# Altium PCB VeggieIrrigation.PcbDoc
Units mil, origin at the board's own origin, x right, y up, seen from the top; angles counter-clockwise.
Board outline 6000 x 4000 mil, 2 copper layers (Top Layer, Bottom Layer); 26 components, 18 nets, 76 pads, 0 vias.
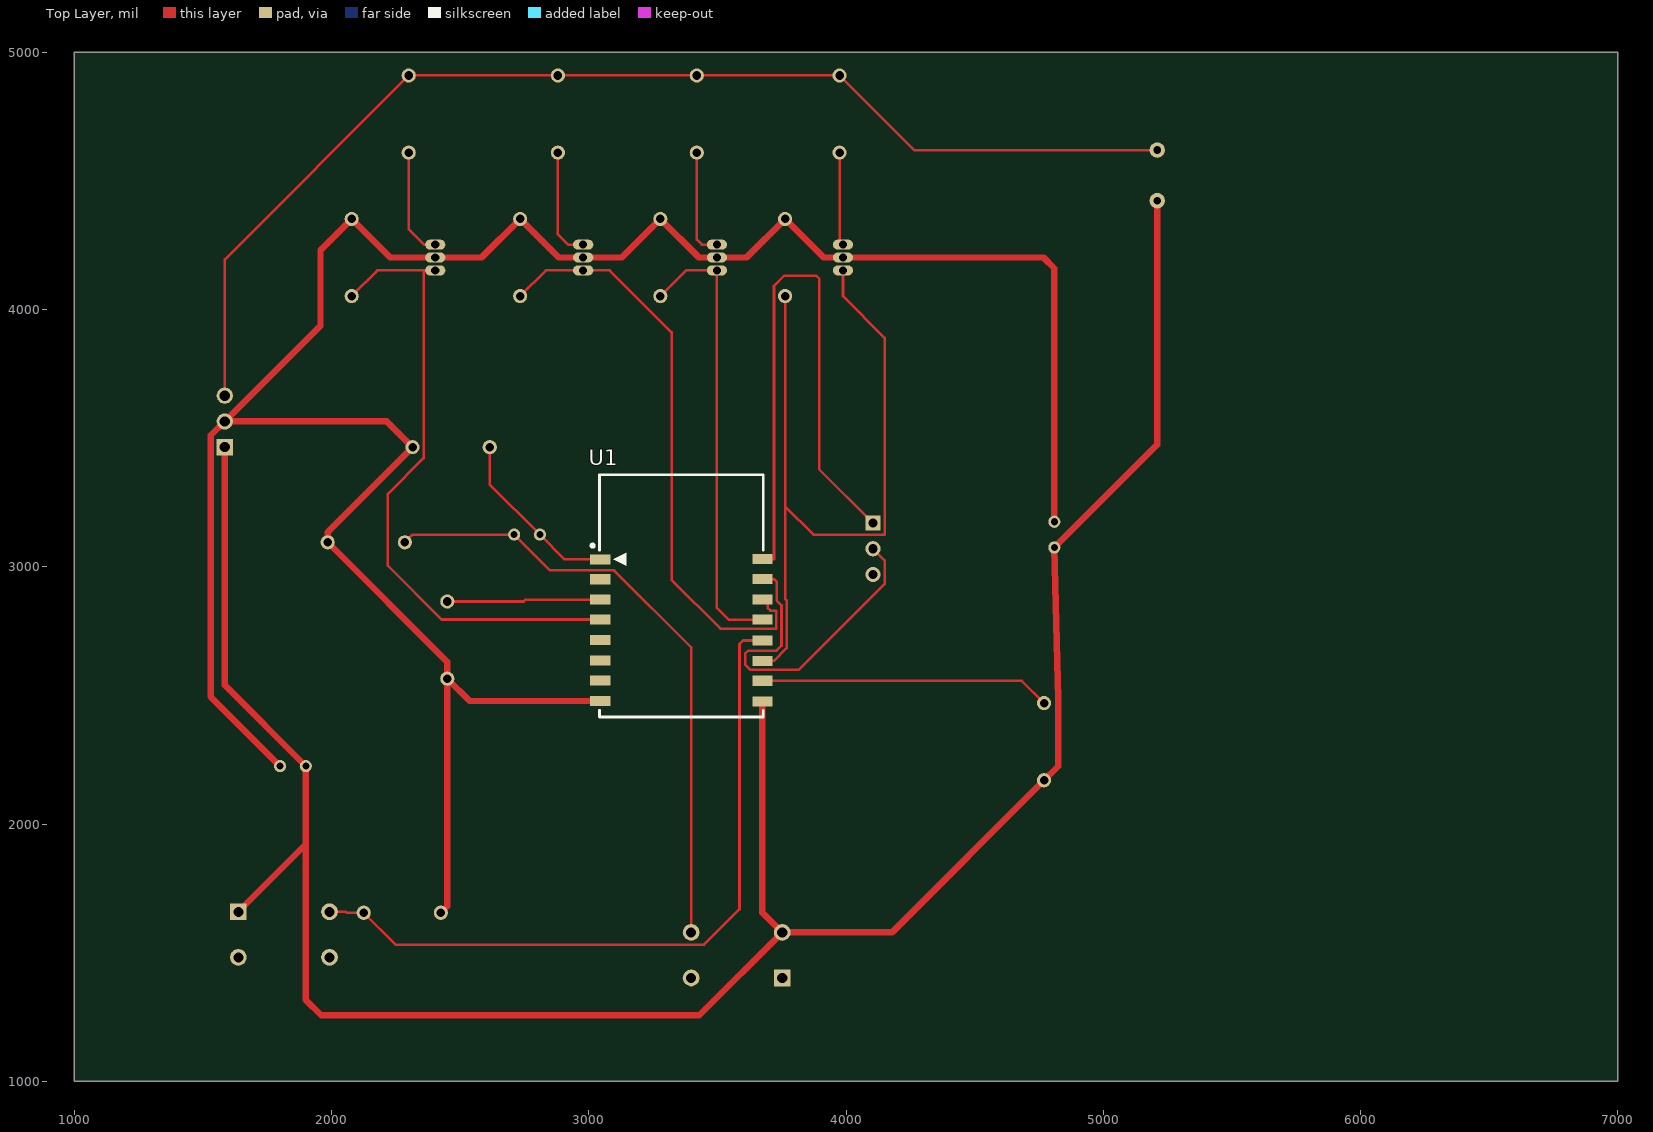
[diagram p0: Top Layer view]
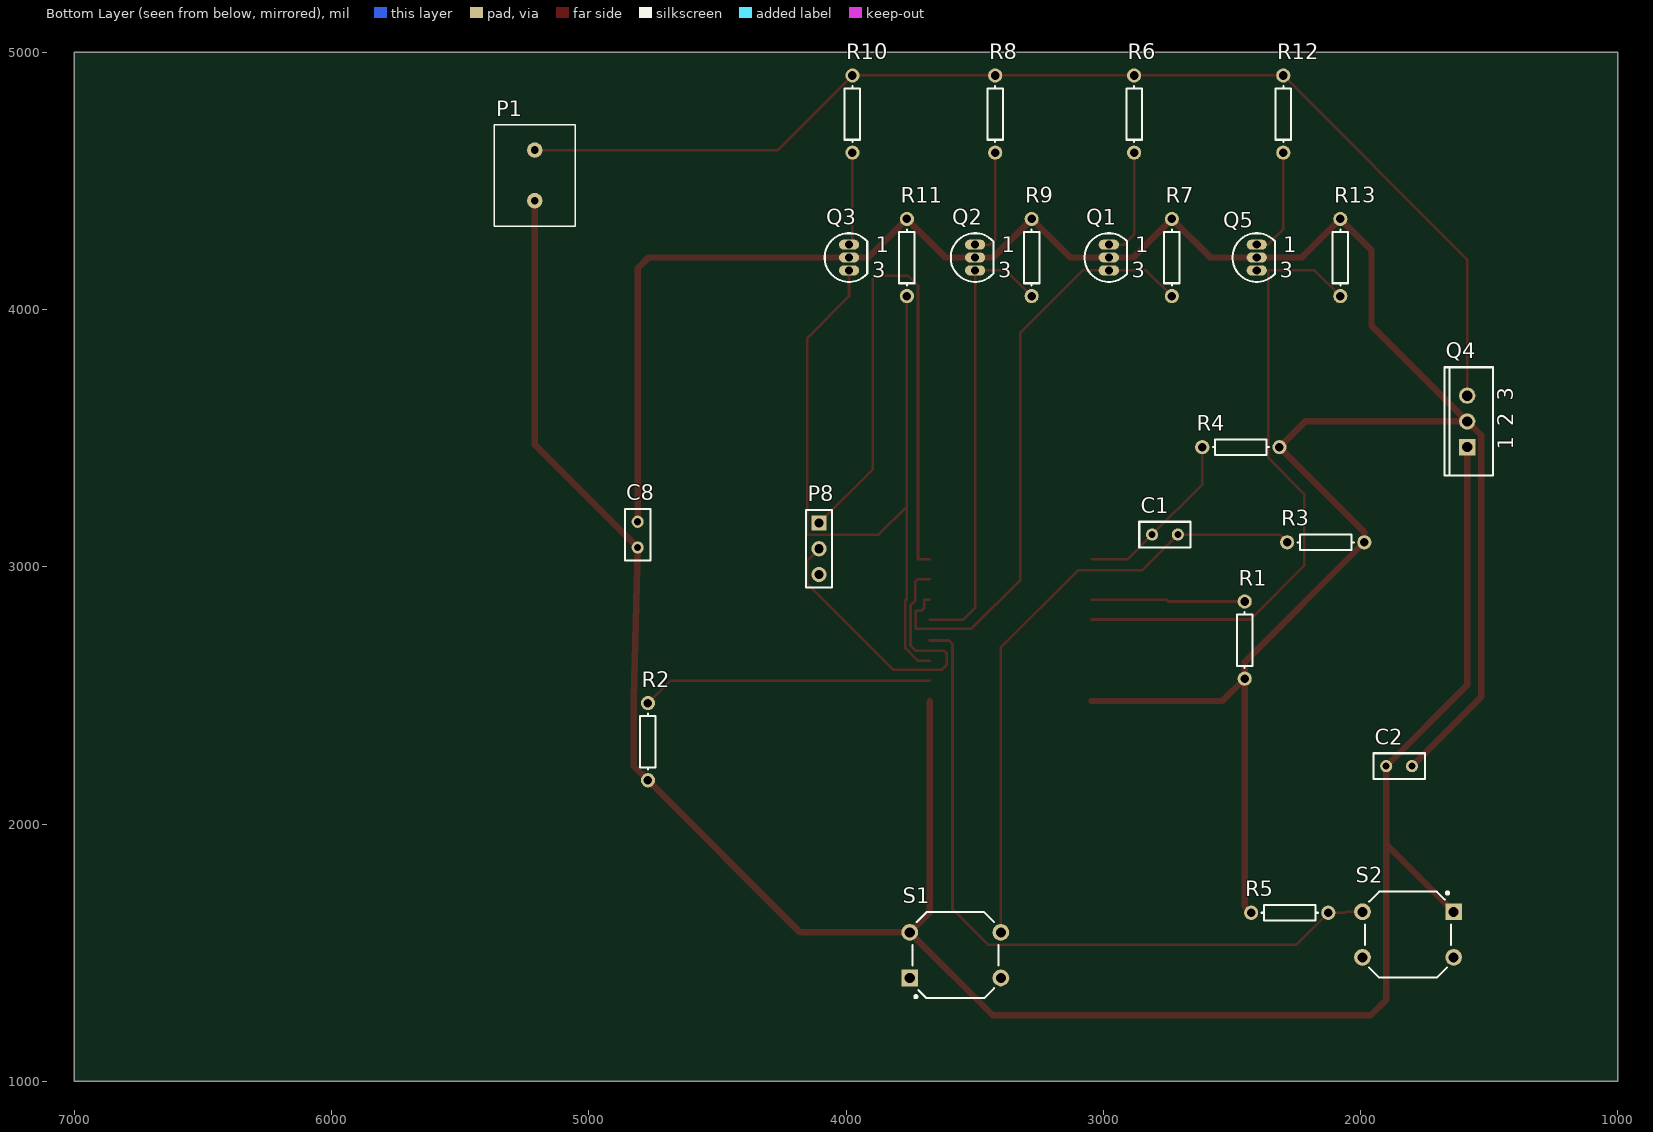
[diagram p1: Bottom Layer view, seen from below]

## Layer stack, top to bottom
Top Solder: solder mask 0.4, Solder Resist, Dk 3.5
Top Layer: signal copper 1.4
Dielectric 1: dielectric 12.6, FR-4, Dk 4.8
Bottom Layer: signal copper 1.4
Bottom Solder: solder mask 0.4, Solder Resist, Dk 3.5

## Board outline
1000,1000 7000,1000 7000,5000 1000,5000

## Design rules (kind name [scope] priority, off if disabled: settings)
Clearance [All] p1: gap=10 ignorepadtopadclearanceinfootprint=FALSE except(0: Arc-Hole Track-Hole SMDPad-Hole THPad-Hole Via-Hole Fill-Hole Poly-Hole Region-Hole Text-Hole)
PolygonConnect [All] p1: connectstyle=Relief reliefconductorwidth=10 reliefentries=4 polygonreliefangle="90 Angle" airgapwidth=10
RoutingLayers [All] p1: top layer_v5=TRUE bottom layer_v5=FALSE
RoutingVias [All] p1: holewidth=28 width=50 viastyle="Through Hole" minholewidth=28 minwidth=50 maxholewidth=28 maxwidth=50
SolderMaskExpansion [All] p1: expansion=4
Width "Schematic Width Constraint_2" [InNet('GND')] p1: maxlimit=30 minlimit=20 preferedwidth=25
Width "Schematic Width Constraint_1" [InNet('+3.3VDC')] p2: maxlimit=30 minlimit=15 preferedwidth=25
Width [All] p3: maxlimit=10 minlimit=10 preferedwidth=10
29 further rules are at their usual default settings.

## Components (designator, comment, footprint, x,y, rotation, side; value= is the part's Value field where it differs from the comment)
C1 "10uf" RAD-0.1 2760,3125 r180 bottom
C2 "100nf" RAD-0.1 1850,2225 r0 bottom value=100nF
C8 "100nf" RAD-0.1 4810,3125 r90 bottom value=100nF
P1 "VAC" ScrewTerminal-X2 5052.52,4324.72 r90 bottom
P8 "Pin export" HDR1X3 4105,3170 r270 bottom
Q1 "2N7000" SOT54 2978.27,4202.2 r180 bottom
Q2 "2N7000" SOT54 3498.27,4202.2 r180 bottom
Q3 "2N7000" SOT54 3988.27,4202.2 r180 bottom
Q4 "Regulador 3.3V" TO-220-AB 1585,3565 r90 bottom
Q5 "2N7000" SOT54 2403.27,4202.2 r180 bottom
R1 "10K" AXIAL-0.3 2450,2715 r90 bottom
R2 "10K" AXIAL-0.3 4770,2320 r270 bottom
R3 "10K" AXIAL-0.3 2135,3095 r180 bottom
R4 "10K" AXIAL-0.3 2465,3465 r180 bottom
R5 "10K" AXIAL-0.3 2275,1655 r0 bottom
R6 "10K" AXIAL-0.3 2880,4760 r90 bottom
R7 "10K" AXIAL-0.3 2733.27,4202.2 r90 bottom
R8 "10K" AXIAL-0.3 3420,4760 r90 bottom
R9 "10K" AXIAL-0.3 3278.27,4202.2 r90 bottom
R10 "10K" AXIAL-0.3 3975,4760 r90 bottom
R11 "10K" AXIAL-0.3 3763.27,4202.2 r90 bottom
R12 "10K" AXIAL-0.3 2300,4760 r90 bottom
R13 "10K" AXIAL-0.3 2078.27,4202.2 r90 bottom
S1 "RST" IT-2175 3575,1490 r180 bottom
S2 "Flash" IT-2175 1815,1570 r0 bottom
U1 "ESP-12" ESP_12 3045.08,3028.82 r0 top

## Footprints (in the part's own frame and the unit in brackets; to place one, negate y for a bottom-side part, rotate by r counter-clockwise, add the part's x,y. Pads: shape width x height; smd on the part's side, far side on the other; paste and mask are expansions set on the pad)
AXIAL-0.3 [mm] "Axial Device, Thru-Hole; 2 Leads; 0.3 in Pin Spacing"
  round 1.4 hole 0.85: 1(-3.81,0) 2(3.81,0)
  silkscreen extent -2.77,-0.76 2.77,0.76
ESP_12 [mm]
  rect 2x1 smd: 1(0,0) 2(0,-1.97) 3(0,-3.97) 4(0,-5.94) 5(0,-7.98) 6(0,-9.99) 7(0,-11.98) 8(0,-13.99) 9(16,-14.03) 10(16,-11.99) 11(16,-10.03) 12(16,-8.01) 13(16,-5.95) 14(16,-3.97) 15(16,-1.95) 16(16,0.03)
  silkscreen extent -0.91,-15.57 16.08,8.37
HDR1X3 [mm] "Connector; Header; 3 Position"
  rect 1.5x1.5 hole 0.9: 1(0,0)
  round 1.5 hole 0.9: 2(2.54,0) 3(5.08,0)
  silkscreen extent -1.27,-1.27 6.35,1.27
IT-2175 [mm] "Switch, Push Button, Thru-Hole; 4 Leads; Body 8.5 x 8.5 mm (LxW typ); Row Spacing 9.0 mm; Pitch 4.5 mm"
  rect 1.65x1.65 hole 1: 1(-4.5,-2.25)
  round 1.65 hole 1: 2(4.5,-2.25) 3(-4.5,2.25) 4(4.5,2.25)
  silkscreen extent -4.25,-4.25 4.25,4.25
RAD-0.1 [mm]
  round 1.2 hole 0.7: 1(-1.27,0) 2(1.27,0)
  silkscreen extent -2.54,-1.27 2.54,1.27
ScrewTerminal-X2 [mil]
  round 60 hole 30: 1(98.43,157.48) 2(295.28,157.48)
  silkscreen extent 0,0 394,315
SOT54 [mm] "TO, Flat Index; 3 In-Line, Axial Leads; Body Dia. 4.6mm; Leads 0.48 x 0.45 mm (max)"
  oval 2x1 hole 0.8: 1(0,1.27) 2(0,0) 3(0,-1.27)
  silkscreen extent -2.4,-2.4 1.8,2.4
TO-220-AB [mm] "TO, Thru-Hole, Vertical, Heatsink Mounted; 3 In-Line Leads; Pitch 2.54 mm"
  rect 1.6x1.6 hole 1: 1(-2.54,0)
  round 1.6 hole 1: 2(0,0) 3(2.54,0)
  silkscreen extent -5.35,-2.55 5.35,2.25

## Part data
C1: library part "Cap Pol1", "Polarized Capacitor (Radial)", LatestRevisionDate=17-Jul-2002, LatestRevisionNote="Re-released for DXP Platform.", PackageDescription="Polarized Capacitor (Radial); 2 Leads", PackageReference=RB7.6-15, Published=8-Jun-2000, Publisher="Altium Limited"
C2 C8: library part Cap, "Capacitor", LatestRevisionDate=17-Jul-2002, LatestRevisionNote="Re-released for DXP Platform.", PackageDescription="Radial Cap, Thru-Hole; 2 Leads; 0.3 in Pin Spacing", PackageReference=RAD-0.3, Published=8-Jun-2000, Publisher="Altium Limited"
P1: library part ScrewTerminal
P8: library part "Header 3", "Header, 3-Pin", LatestRevisionDate=17-Jul-2002, LatestRevisionNote="Re-released for DXP Platform.", Publisher="Altium Limited"
Q1 Q2 Q3 Q5: "N-channel Enhancement Mode Field-effect Transistor", Code_JEDEC=TO-92, Code_JEITA=SC-43, ComponentLink1Description="Manufacturer Link", ComponentLink1URL=http://www.semiconductors.philips.com/, ComponentLink2Description=Datasheet, ComponentLink2URL=http://www.semiconductors.philips.com/acrobat/datasheets/2N7000-03.pdf, DatasheetVersion=19-May-2000, LatestRevisionDate=12-Dec-2006, LatestRevisionNote="Footprint pad sequence fixed.", PackageDescription="Plastic Single-Ended Leaded (through hole) package; 3 Leads (TO-92)", PackageReference=SOT54, PackageVersion=Feb-1997, Published=17-Sep-2003, Publisher="Altium Limited"
Q4: library part AMS1117
R1 R2 R3 R4 R5 R6 R7 R8 R9 R10 R11 R12 R13: library part Res1, "Resistor", LatestRevisionDate=17-Jul-2002, LatestRevisionNote="Re-released for DXP Platform.", PackageDescription="Axial Device, Thru-Hole; 2 Leads; 0.3 in Pin Spacing", PackageReference=AXIAL-0.3, Published=8-Jun-2000, Publisher="Altium Limited"
S1 S2: library part IT-2175, "Tactile Switch, DPST; Thru-Hole; Vertical; Rating DC 12V, 50mA (max)", PackageDocument=Rev.0, ComponentLink1Description="Manufacturer Link", ComponentLink1URL=http://www.ilswitch.com/, ComponentLink2Description="Device Overview", ComponentLink2URL=http://www.ilswitch.com/list.php?ac_id=010112&ai_id=91, DatasheetDocument=Rev.0, PackageReference=IT-2175, Published=6-Jun-2005, Publisher="Altium Limited"

## Nets (pads, with @x,y where several pads share a name; then routed paths per layer and width w, separated by ;. In a path a pad name is that pad's centre, name@x,y a point inside that pad or via, vN(x,y) a via of type N, cw(c..) or ccw(c..) an arc to the next point about the centre after c; other vN are vias at no path point)
+3.3VDC: C2.1 C8.2 Q1.2 Q2.2 Q3.2 Q4.2 Q5.2 R1.1 R3.2 R4.2 R5.2 R7.2 R9.2 R11.2 R13.2 U1.8 | length 10186.6
  Top Layer w25: C2.1 1531,2494 1531,3511 Q4.2 ; R5.2 2450,1680 R1.1 ; U1.8 2536.97,2478.03 R1.1 ; C8.2 4810,4160 4767.8,4202.2 Q3.2 3913.27,4202.2 R11.2 3613.27,4202.2 Q2.2 3428.27,4202.2 R9.2 3128.27,4202.2 Q1.2 2883.27,4202.2 R7.2 2583.27,4202.2 Q5.2 2228.27,4202.2 R13.2 1957,4230.94 1957,3937 Q4.2 ; Q4.2 2215,3565 R4.2 1985,3135 R3.2 2450,2630 R1.1
+5VDC: P1.2 Q4.3 R6.2 R8.2 R10.2 R12.2 | length 4571.3
  Top Layer w10: Q4.3 1585,4195 R12.2 R6.2 R8.2 R10.2 4265,4620 P1.2
GND: C2.2 C8.1 P1.1 Q4.1 R2.2 S1.3 S2.1 U1.9 | length 9295.3
  Top Layer w25: Q4.1 1585,2540 C2.2 1900,1920.75 ; S2.1 1900,1920.75 ; U1.9 3675,1655.75 S1.3 ; P1.1 5210,3475 C8.1 4825,2486 4825,2225 R2.2 4178.58,1578.58 S1.3 ; 1900,1920.75 1900,1316 1960,1256 3429.58,1256 S1.3
NetC1_1: C1.1 R4.1 U1.1 | length 695.7
  Top Layer w10: R4.1 2615,3320 C1.1 2906.18,3028.82 U1.1
NetC1_2: C1.2 R3.1 S1.4 | length 2415.2
  Top Layer w10: R3.1 2315,3125 C1.2 2849,2986 3099,2986 3397.83,2687.17 S1.4
NetP8_1: P8.1 U1.16 | length 2341.1
  Top Layer w10: U1.16 3720,3030 3720,4092 3760,4132 3884,4132 3896,4120 3896,3379 P8.1
NetP8_2: P8.2 U1.15 | length 1356.9
  Top Layer w10: U1.15 3720,2952.05 3730,2942.05 3730,2869.37 3749.37,2850 3749.37,2693.37 3730,2674 3620,2674 3608,2662 3608,2620 3629,2599 3816,2599 4150,2933 4150,3025 P8.2
NetQ1_1: Q1.1 R6.1 | length 432.6
  Top Layer w10: R6.1 2880,4292.2 2920,4252.2 Q1.1
NetQ1_3: Q1.3 R7.1 U1.14 | length 2339.6
  Top Layer w10: R7.1 2833.27,4152.2 Q1.3 3081,4152.2 3322,3911.2 3322,2949 3511.8,2759.2 3729.37,2759.2 3729.37,2829.25 3705.75,2829.25 3695,2840 3695,2872.52 U1.14
NetQ2_1: Q2.1 R8.1 | length 424.3
  Top Layer w10: R8.1 3420,4272.2 3440,4252.2 Q2.1
NetQ2_3: Q2.3 R9.1 U1.13 | length 1769.4
  Top Layer w10: R9.1 3378.27,4152.2 Q2.3@3498,4152.2 ; Q2.3 Q2.3@3498,4152.2 ; U1.13 3543.43,2794.57 3498,2840 Q2.3@3498,4152.2
NetQ3_1: Q3.1 R10.1 | length 371.1
  Top Layer w10: R10.1 3975,4252.2 Q3.1
NetQ3_3: Q3.3 R11.1 U1.11 | length 3012.7
  Top Layer w10: U1.11 3720,2633.94 3769.37,2683.31 3769.37,2869.25 3763.27,2875.36 3763.27,3235 ; R11.1 3763.27,3235 ; Q3.3 3988.27,4051.73 4150,3890 4150,3125 3873.27,3125 3763.27,3235
NetQ5_1: Q5.1 R12.1 | length 425.9
  Top Layer w10: R12.1 2300,4312.2 2360,4252.2 Q5.1
NetQ5_3: Q5.3 R13.1 U1.4 | length 2484.9
  Top Layer w10: R13.1 2178.27,4152.2 2358,4152.2 ; Q5.3 2358,4152.2 ; U1.4 2428.04,2794.96 2219,3004 2219,3283 2358,3422 2358,4152.2
NetR1_2: R1.2 U1.3 | length 598.2
  Top Layer w10: R1.2 2747,2865 2754.52,2872.52 U1.3
NetR2_1: R2.1 U1.10 | length 1130.9
  Top Layer w10: U1.10 4683.23,2556.77 R2.1
NetR5_1: R5.1 S2.2 U1.12 | length 2829.1
  Top Layer w10: S2.2 2056,1658.58 2059.58,1655 R5.1 2249,1531 3448,1531 3586,1669 3586,2699.39 3600.08,2713.46 U1.12
pads on no net: P8.3 S1.1 S1.2 S2.3 S2.4 U1.2 U1.5 U1.6 U1.7

## Text inside footprints (layer, text, board x,y; h text height)
Q1: Bottom Overlay "3" at 2888.7,4122.68 h59.06; Bottom Overlay "1" at 2875.28,4222.68 h59.06
Q2: Bottom Overlay "3" at 3408.7,4122.68 h59.06; Bottom Overlay "1" at 3395.28,4222.68 h59.06
Q3: Bottom Overlay "3" at 3898.7,4122.68 h59.06; Bottom Overlay "1" at 3885.28,4222.68 h59.06
Q4: Bottom Overlay "3" at 1406.85,3645.32 h59.06 r270; Bottom Overlay "2" at 1406.85,3545.32 h59.06 r270; Bottom Overlay "1" at 1406.85,3455.16 h59.06 r270
Q5: Bottom Overlay "3" at 2313.7,4122.68 h59.06; Bottom Overlay "1" at 2300.28,4222.68 h59.06
U1: Mechanical 13 "CUTOUT POLYGON" at 3050.08,3318.82 h10; Mechanical 13 "ANTENNA AREA" at 3050.08,3338.82 h10